# EAGLE board uno (EAGLE 6.1)
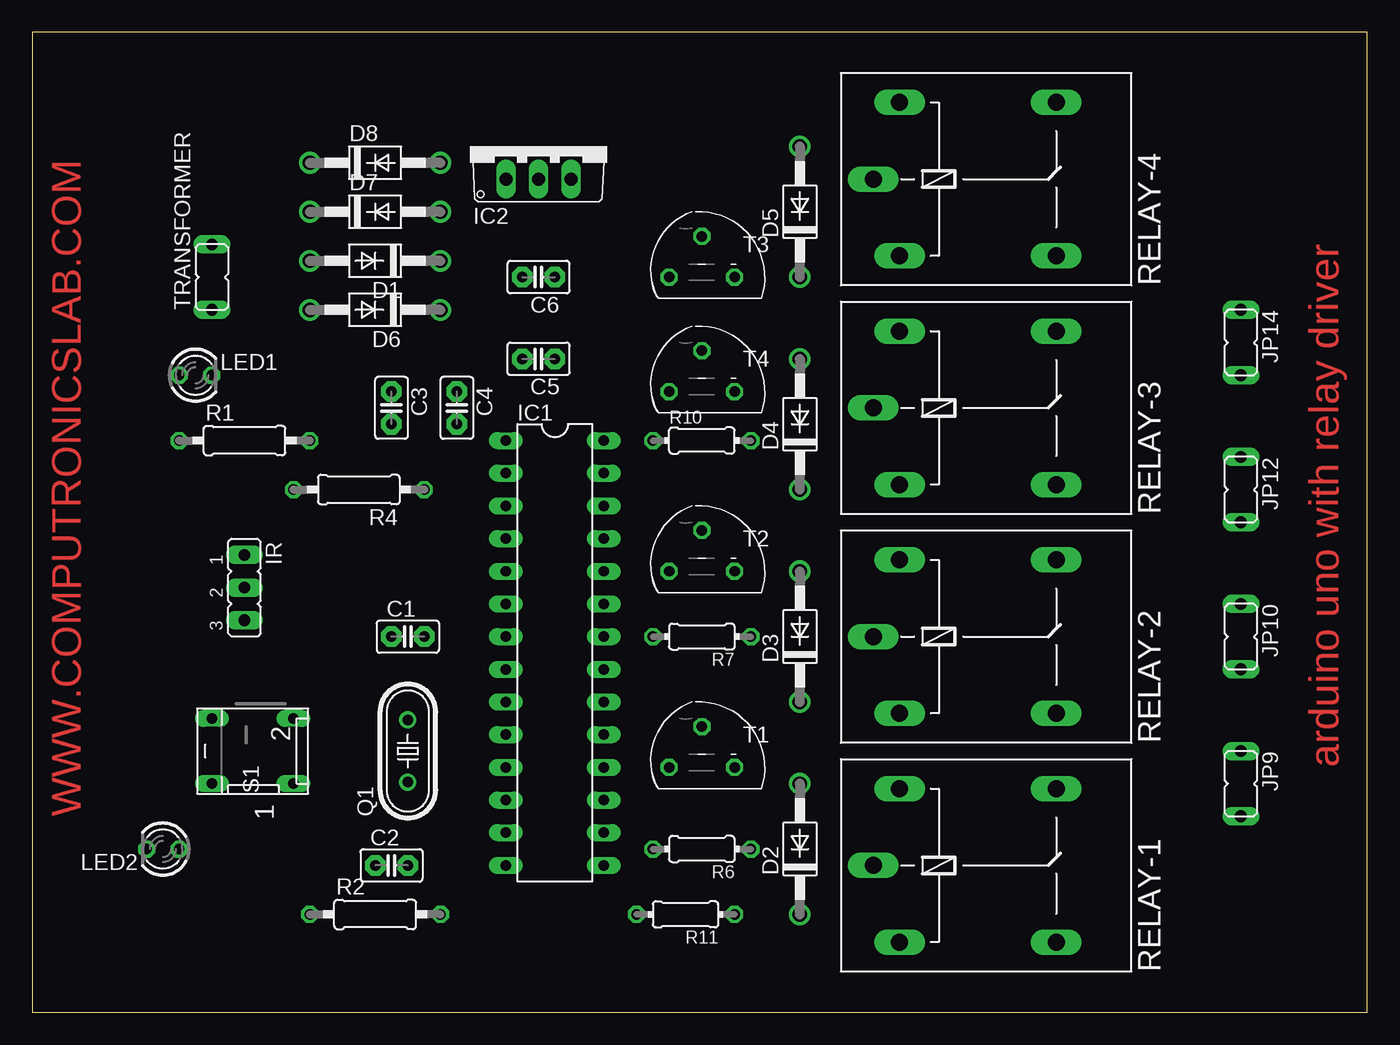
[diagram p0: board, top side]
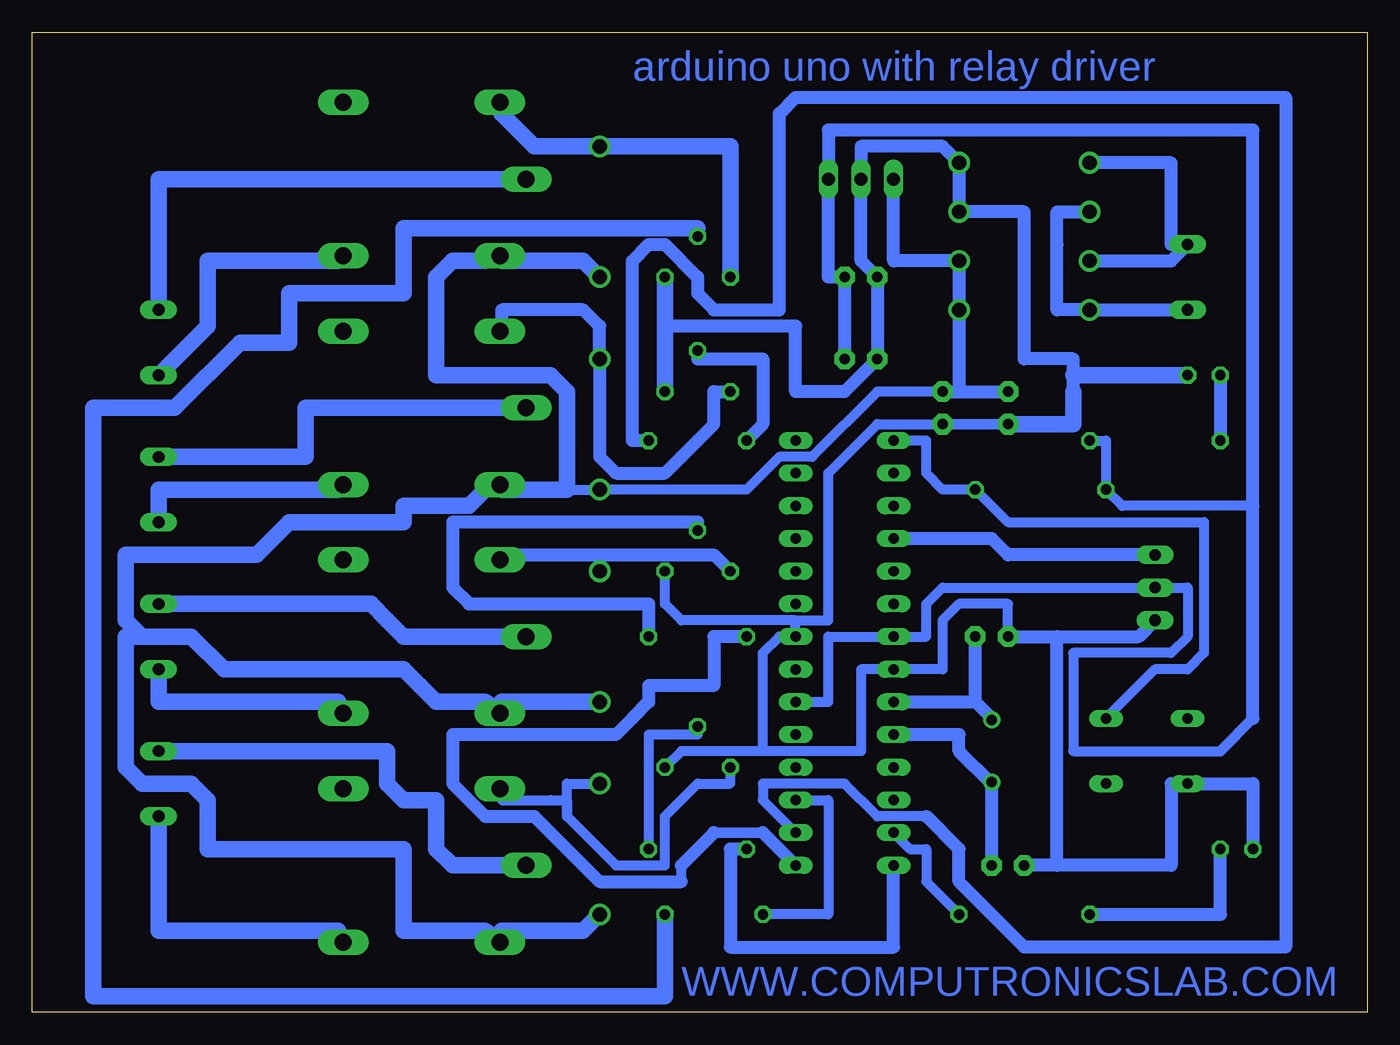
[diagram p1: board, bottom side, seen from below]

Size 103.81 x 76.19 mm. Coordinates in mm from the lower left corner, seen from the top.
Outline: 0,0 103.81,0 103.81,76.19 0,76.19 0,0
Copper layers (1*16): Top 0.035mm / dielectric 1.5mm / Bottom 0.035mm
Design rules: minimum track width 30mil, minimum drill 24mil, track to track 8mil, track to pad 8mil, pad to pad 8mil, via to via 8mil, smd to smd 8mil, copper to edge 40mil, drill to drill 8mil, minimum pad ring 10mil, minimum via ring 8mil, stop-mask expansion 4mil, vias tented up to drill 0mil, thermal gap 10mil

## Footprints (pad centres in the part's own frame; a part is rotated, then mirrored left to right if it is on the bottom)
C2.5-2 = drill 0.813 pad 1.6 octagon: 1 -1.27,0; 2 1.27,0
DO41-10 = drill 1.118: A 5.08,0; C -5.08,0
DIL28-3 = drill 0.813 long: 1 -16.51,-3.81; 2 -13.97,-3.81; 3 -11.43,-3.81; 4 -8.89,-3.81; 5 -6.35,-3.81; 6 -3.81,-3.81; 7 -1.27,-3.81; 8 1.27,-3.81; 9 3.81,-3.81; 10 6.35,-3.81; 11 8.89,-3.81; 12 11.43,-3.81; 13 13.97,-3.81; 14 16.51,-3.81; 15 16.51,3.81; 16 13.97,3.81; 17 11.43,3.81; 18 8.89,3.81; 19 6.35,3.81; 20 3.81,3.81; 21 1.27,3.81; 22 -1.27,3.81; 23 -3.81,3.81; 24 -6.35,3.81; 25 -8.89,3.81; 26 -11.43,3.81; 27 -13.97,3.81; 28 -16.51,3.81
TO220V = drill 1.016 long: 1 -2.54,-2.54; 2 0,-2.54; 3 2.54,-2.54
JP2 = drill 0.914 long: 1 -2.54,0; 2 0,0; 3 2.54,0
JP1 = drill 0.914 long: 1 0,-2.54; 2 0,2.54
LED3MM = drill 0.813 octagon: A -1.27,0; K 1.27,0
HC49/S = drill 0.813: 1 -2.413,0; 2 2.413,0
0207/10 = drill 0.813 octagon: 1 -5.08,0; 2 5.08,0
0204/7 = drill 0.813 octagon: 1 -3.81,0; 2 3.81,0
G5LE = drill 1.321 long: 1 -7.493,-5.969; 2 -7.493,5.969; O 4.699,5.969; P -9.525,0; S 4.699,-5.969
DP-02 = drill 0.813 long: 1 -2.54,-2.54; 2 2.54,-2.54; 3 2.54,3.81; 4 -2.54,3.81
TO92 = drill 0.813 octagon: 1 2.54,-1.27; 2 0,1.905; 3 -2.54,-1.27

## Placement (x,y rotation side)
C1  22pf  [C2.5-2]  29.21,29.21 0 top
C2  22pf  [C2.5-2]  27.94,11.43 0 top
C3  470uF  [C2.5-2]  27.94,46.99 270 top
C4  0.1uf  [C2.5-2]  33.02,46.99 270 top
C5  0.1uf  [C2.5-2]  39.37,50.8 180 top
C6  4.7uf  [C2.5-2]  39.37,57.15 180 top
D1  1N4007  [DO41-10]  26.67,58.42 180 top
D2  1N4007  [DO41-10]  59.69,12.7 90 top
D3  1N4007  [DO41-10]  59.69,29.21 90 top
D4  1N4007  [DO41-10]  59.69,45.72 90 top
D5  1N4007  [DO41-10]  59.69,62.23 90 top
D6  1N4007  [DO41-10]  26.67,54.61 180 top
D7  1N4007  [DO41-10]  26.67,62.23 0 top
D8  1N4007  [DO41-10]  26.67,66.04 0 top
IC1  ATMEGA328  [DIL28-3]  40.64,27.94 270 top
IC2  7805  [TO220V]  39.37,67.31 0 top
IR  3 pin  [JP2]  16.51,33.02 270 top
JP9  AC CONNECTOR  [JP1]  93.98,17.78 180 top
JP10  AC CONNECTOR  [JP1]  93.98,29.21 180 top
JP12  AC CONNECTOR  [JP1]  93.98,40.64 180 top
JP14  AC CONNECTOR  [JP1]  93.98,52.07 180 top
LED1  [LED3MM]  12.7,49.53 0 top
LED2  [LED3MM]  10.16,12.7 180 top
Q1  12MHZ  [HC49/S]  29.21,20.32 90 top
R1  220R  [0207/10]  16.51,44.45 0 top
R2  330R  [0207/10]  26.67,7.62 0 top
R4  10K  [0207/10]  25.4,40.64 180 top
R6  5.6K  [0204/7]  52.07,12.7 180 top
R7  5.6K  [0204/7]  52.07,29.21 180 top
R10  5.6K  [0204/7]  52.07,44.45 0 top
R11  5.6K  [0204/7]  50.8,7.62 180 top
RELAY-1  12V  [G5LE]  74.93,11.43 0 top
RELAY-2  12V  [G5LE]  74.93,29.21 0 top
RELAY-3  12V  [G5LE]  74.93,46.99 0 top
RELAY-4  12V  [G5LE]  74.93,64.77 0 top
S1  [DP-02]  17.78,20.32 90 top
T1  BC547  [TO92]  52.07,20.32 0 top
T2  BC547  [TO92]  52.07,35.56 0 top
T3  BC547  [TO92]  52.07,58.42 0 top
T4  BC547  [TO92]  52.07,49.53 0 top
TRANSFORMER  AC CONNECTOR  [JP1]  13.97,57.15 0 top

## Library data of the parts
C1-C6 = capacitor-wima
D1-D8 = diode
IC1 = quantum-research-group; OC_FARNELL: unknown; OC_NEWARK: unknown
IC2 = linear
IR JP9 JP10 JP12 JP14 TRANSFORMER = jumper
LED1 LED2 = led
Q1 = crystal; OC_FARNELL: 1667008; OC_NEWARK: unknown
R1 R2 R4 R6 R7 R10 R11 = rcl
RELAY-1-RELAY-4 = relay; OC_FARNELL: unknown; OC_NEWARK: unknown
S1 = switch-dil; MPN: MCDP02; OC_FARNELL: 1255233; OC_NEWARK: 26M1095
T1-T4 = transistor

## Nets
N$1: C1.2 IC1.9 Q1.2
N$2: C2.2 IC1.10 Q1.1
N$3: D6.A D7.C TRANSFORMER.1
N$4: C5.1 C6.1 IC1.7 IC1.20 IC2.3 IR.2 R1.2 R4.2
N$6: LED1.A R1.1
N$7: C3.1 C4.1 D1.C D2.C D3.C D4.C D5.C D6.C IC2.1 RELAY-1.1 RELAY-2.1 RELAY-3.1 RELAY-4.1
N$14: IC1.4 IR.1
N$17: D1.A D8.C TRANSFORMER.2
N$21: IC1.13 R2.2
N$22: C1.1 C2.1 C3.2 C4.2 C5.2 C6.2 D7.A D8.A IC1.8 IC1.22 IC2.2 IR.3 LED1.K LED2.K S1.4 T1.1 T2.1 T3.1 T4.1
N$28: D2.A RELAY-1.2 T1.3
N$29: R7.1 T2.2
N$30: R6.1 T1.2
N$31: IC1.1 R4.1 S1.2
N$32: LED2.A R2.1
N$35: JP9.2 RELAY-1.S
N$36: JP9.1 RELAY-1.P
N$38: JP10.2 RELAY-2.S
N$39: JP10.1 RELAY-2.P
N$41: IC1.14 R6.2
N$42: D3.A RELAY-2.2 T2.3
N$43: D4.A RELAY-3.2 T4.3
N$45: R11.1 T3.2
N$46: R10.1 T4.2
N$49: JP12.2 RELAY-3.S
N$50: JP12.1 RELAY-3.P
N$51: JP14.2 RELAY-4.S
N$53: JP14.1 RELAY-4.P
N$56: IC1.16 R10.2
N$57: IC1.17 R11.2
N$58: D5.A RELAY-4.2 T3.3
N$59: IC1.15 R7.2

## Tracks (layer width: path | path; a pad name or v marks a point on that pad's centre or on a via)
N$1
  Bottom 0.762: 29.21,22.86 Q1.2
  Bottom 1.016: 30.48,24.13 29.21,22.86 | IC1.9 30.48,24.13 | 30.48,24.13 C1.2
N$2
  Bottom 0.762: 29.21,17.78 Q1.1
  Bottom 1.016: C2.2 29.21,17.78 31.75,20.32 31.75,21.59 IC1.10
N$3
  Bottom 1.016: TRANSFORMER.1 D6.A 24.13,54.61 24.13,59.69 24.13,62.23 D7.C
N$4
  Bottom 0.762: R1.2 20.32,44.45 R4.2 19.05,39.37 8.89,39.37 | IC1.20 41.91,24.13 41.91,29.21 IC1.7 34.29,29.21 34.29,31.75 33.02,33.02 IR.2 13.97,33.02 13.97,29.21 15.24,27.94 22.86,27.94 22.86,20.32 11.43,20.32
  Bottom 0.813: 11.43,20.32 8.89,22.86
  Bottom 1.016: C5.1 C6.1 41.91,57.15 IC2.3 41.91,68.58 8.89,68.58 8.89,39.37 8.89,22.86
N$6
  Bottom 1.016: LED1.A R1.1
N$7
  Bottom 0.762: 62.23,40.64 D4.C 48.26,40.64 45.72,43.18 43.18,43.18 38.1,48.26 C4.1 | 68.58,40.64 RELAY-3.1 | 68.58,58.42 RELAY-4.1
  Bottom 1.016: C4.1 31.75,48.26 | 31.75,48.26 C3.1 | IC2.1 36.83,58.42 D1.C D6.C 31.75,48.26
  Bottom 1.27: D2.C 60.96,6.35 67.31,6.35 RELAY-1.1 68.58,6.35 74.93,6.35 74.93,12.7 90.17,12.7 90.17,16.51 91.44,17.78 95.25,17.78 96.52,19.05 96.52,29.21 95.25,29.21 | D5.C 60.96,58.42 67.31,58.42 RELAY-4.1 | D3.C 67.31,24.13 RELAY-2.1 68.58,24.13 72.39,24.13 73.66,25.4 74.93,26.67 88.9,26.67 91.44,29.21 95.25,29.21 | RELAY-3.1 67.31,40.64 62.23,40.64 62.23,48.26 63.5,49.53 72.39,49.53 72.39,57.15 71.12,58.42 68.58,58.42 | 95.25,29.21 96.52,30.48 96.52,35.56 86.36,35.56 83.82,38.1 74.93,38.1 74.93,39.37 69.85,39.37 68.58,40.64
N$14
  Bottom 1.016: IR.1 27.94,35.56 29.21,36.83 IC1.4
N$17
  Bottom 0.762: TRANSFORMER.2 15.24,59.69
  Bottom 1.016: TRANSFORMER.2 15.24,58.42 D1.A | 15.24,59.69 15.24,63.5 15.24,66.04 D8.C
N$21
  Bottom 0.762: R2.2 34.29,10.16 34.29,12.7 35.56,12.7 IC1.13
N$22
  Bottom 0.762: T1.1 53.34,20.32 46.99,20.32 | 46.99,20.32 39.37,20.32 39.37,26.67 IC1.8 33.02,26.67 33.02,30.48 31.75,31.75 27.94,31.75 C1.1 | 46.99,20.32 46.99,27.94 45.72,29.21 IC1.22 44.45,30.48 | T2.1 54.61,31.75 53.34,30.48 44.45,30.48 | S1.4 15.24,17.78 | C4.2 38.1,45.72 41.91,41.91 41.91,30.48 44.45,30.48
  Bottom 0.813: 22.86,48.26 22.86,49.53 | C3.2 C4.2
  Bottom 1.016: 54.61,53.34 44.45,53.34 44.45,48.26 40.64,48.26 C5.2 C6.2 39.37,58.42 IC2.2 39.37,67.31 33.02,67.31 D8.A D7.A 26.67,62.23 26.67,50.8 22.86,50.8 22.86,48.26 | IR.3 17.78,29.21 24.13,29.21 | C1.1 24.13,29.21 | S1.4 8.89,17.78 LED2.K | 24.13,11.43 C2.1 | 15.24,17.78 15.24,11.43 24.13,11.43 | 24.13,11.43 24.13,29.21
  Bottom 1.27: T3.1 54.61,53.34 T4.1 | 22.86,49.53 LED1.K | C3.2 22.86,45.72 22.86,48.26
N$28
  Bottom 0.762: T1.3 49.53,17.78 52.07,17.78 54.61,15.24 54.61,13.97 54.61,11.43 58.42,11.43 62.23,15.24 | 62.23,15.24 62.23,16.51 63.5,16.51 67.31,16.51 RELAY-1.2 | 62.23,15.24 62.23,17.78 D2.A
N$29
  Bottom 0.762: 52.07,38.1 T2.2
  Bottom 1.016: R7.1 55.88,31.75 69.85,31.75 71.12,33.02 71.12,38.1 52.07,38.1
N$30
  Bottom 0.762: R6.1 55.88,21.59 52.07,21.59 T1.2
N$31
  Bottom 0.762: S1.2 16.51,26.67 13.97,26.67 12.7,27.94 12.7,38.1 27.94,38.1 R4.1 33.02,40.64 34.29,41.91 34.29,44.45 IC1.1
N$32
  Bottom 1.016: LED2.A 11.43,7.62 R2.1
N$35
  Bottom 1.27: JP9.2 93.98,6.35 80.01,6.35 RELAY-1.S
N$36
  Bottom 1.27: JP9.1 76.2,20.32 76.2,17.78 74.93,16.51 72.39,16.51 72.39,12.7 71.12,11.43 RELAY-1.P
N$38
  Bottom 1.27: JP10.2 93.98,24.13 91.44,24.13 80.01,24.13 RELAY-2.S
N$39
  Bottom 1.27: JP10.1 77.47,31.75 76.2,30.48 74.93,29.21 RELAY-2.P
N$41
  Bottom 1.016: IC1.14 36.83,5.08 49.53,5.08 49.53,12.7 R6.2
N$42
  Bottom 0.762: 67.31,35.56 RELAY-2.2
  Bottom 1.016: T2.3 50.8,35.56 59.69,35.56 | 67.31,35.56 59.69,35.56 | 59.69,35.56 D3.A
N$43
  Bottom 0.762: 67.31,53.34 RELAY-3.2
  Bottom 1.016: T4.3 50.8,48.26 50.8,45.72 52.07,44.45 53.34,43.18 54.61,41.91 58.42,41.91 59.69,43.18 D4.A 59.69,53.34 60.96,54.61 67.31,54.61 67.31,53.34
N$45
  Bottom 0.762: 52.07,60.96 T3.2
  Bottom 1.27: R11.1 54.61,1.27 99.06,1.27 99.06,46.99 92.71,46.99 87.63,52.07 83.82,52.07 83.82,55.88 74.93,55.88 74.93,60.96 52.07,60.96
N$46
  Bottom 0.762: 52.07,50.8 T4.2
  Bottom 1.016: R10.1 46.99,45.72 46.99,50.8 52.07,50.8
N$49
  Bottom 1.27: JP12.2 93.98,39.37 93.98,40.64 91.44,40.64 80.01,40.64 RELAY-3.S
N$50
  Bottom 1.27: JP12.1 82.55,43.18 82.55,46.99 RELAY-3.P
N$51
  Bottom 1.27: JP14.2 90.17,53.34 90.17,58.42 85.09,58.42 80.01,58.42 RELAY-4.S
N$53
  Bottom 1.27: JP14.1 93.98,64.77 RELAY-4.P
N$56
  Bottom 0.762: IC1.16 46.99,16.51 46.99,17.78 40.64,17.78 38.1,15.24 34.29,15.24
  Bottom 1.016: 34.29,15.24 31.75,12.7 31.75,10.16 26.67,5.08 6.35,5.08 6.35,71.12 44.45,71.12 45.72,69.85 45.72,54.61 50.8,54.61 52.07,55.88 52.07,57.15 54.61,59.69 55.88,59.69 57.15,58.42 57.15,44.45 R10.2
N$57
  Bottom 0.762: R11.2 41.91,7.62 41.91,16.51 IC1.17
N$58
  Bottom 1.27: T3.3 49.53,67.31 D5.A 64.77,67.31 67.31,69.85 RELAY-4.2
N$59
  Bottom 0.762: 53.34,10.16 53.34,11.43
  Bottom 0.813: 50.8,13.97 46.99,13.97
  Bottom 1.016: 46.99,13.97 IC1.15 | 53.34,11.43 50.8,13.97 | 53.34,10.16 59.69,10.16 64.77,15.24 68.58,15.24 71.12,17.78 71.12,21.59 58.42,21.59 57.15,22.86 55.88,24.13 55.88,25.4 50.8,25.4 50.8,29.21 R7.2

## Text on the board
Top: arduino uno with relay driver | WWW.COMPUTRONICSLAB.COM
Bottom: arduino uno with relay driver | WWW.COMPUTRONICSLAB.COM